# Altium PCB DiAoPu.PcbDoc
Units mm, origin at the board's own origin, x right, y up, seen from the top; angles counter-clockwise.
Board outline 36.45 x 14.22 mm, 4 copper layers (Component Side, Ground Plane, Power Plane, Solder Side), stack 0.844 mm thick; 21 components, 16 nets, 65 pads, 70 vias.
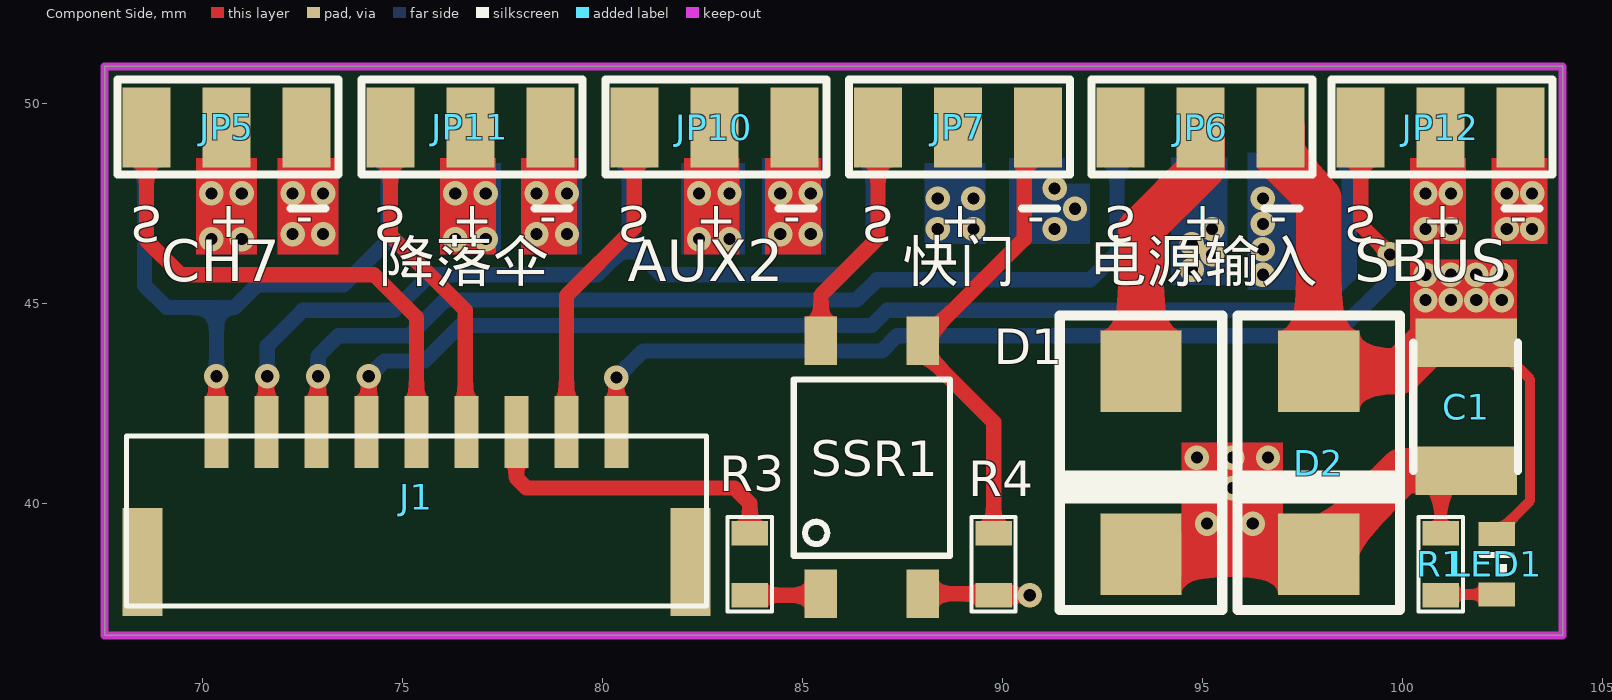
[diagram p0: Component Side view]
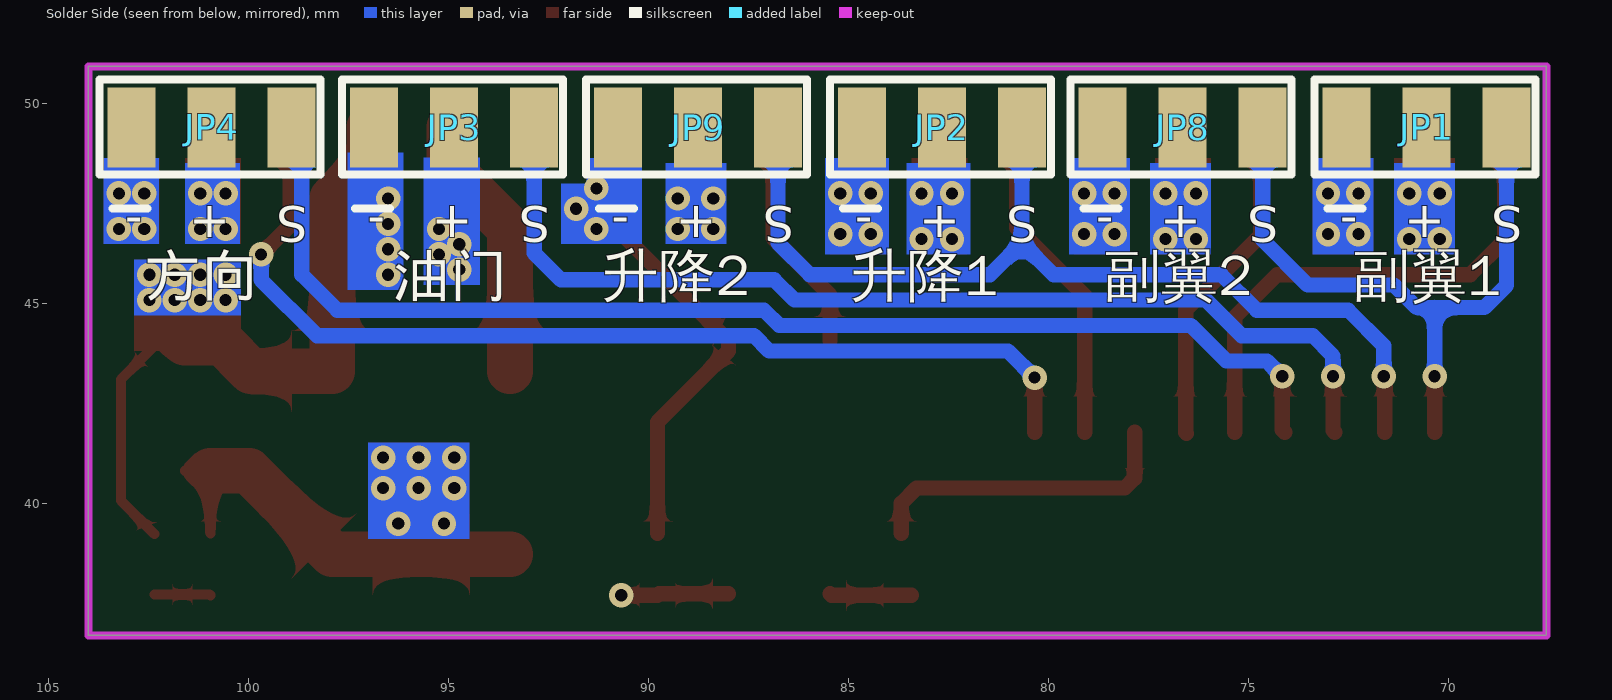
[diagram p1: Solder Side view, seen from below]
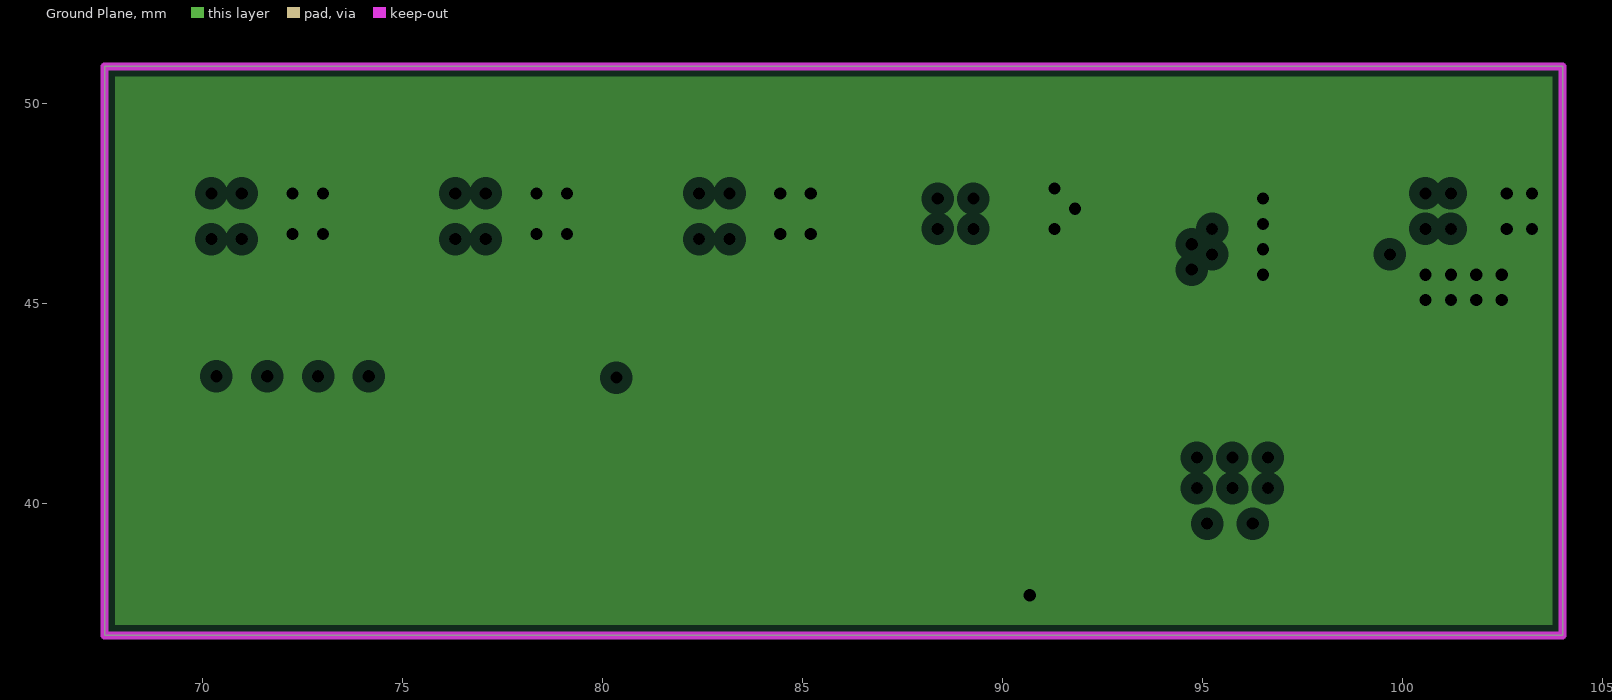
[diagram p2: Ground Plane, clearances drawn from the general rule]
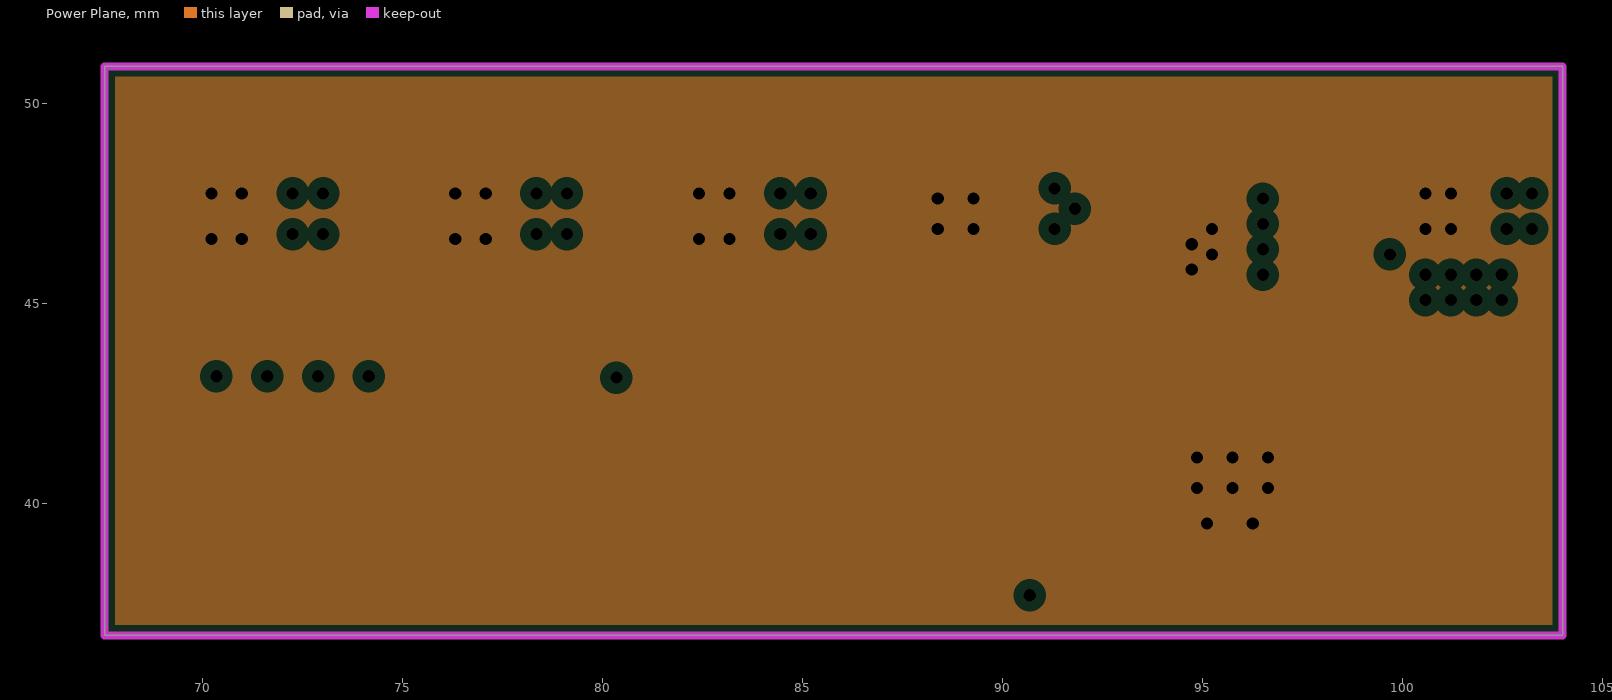
[diagram p3: Power Plane, clearances drawn from the general rule]
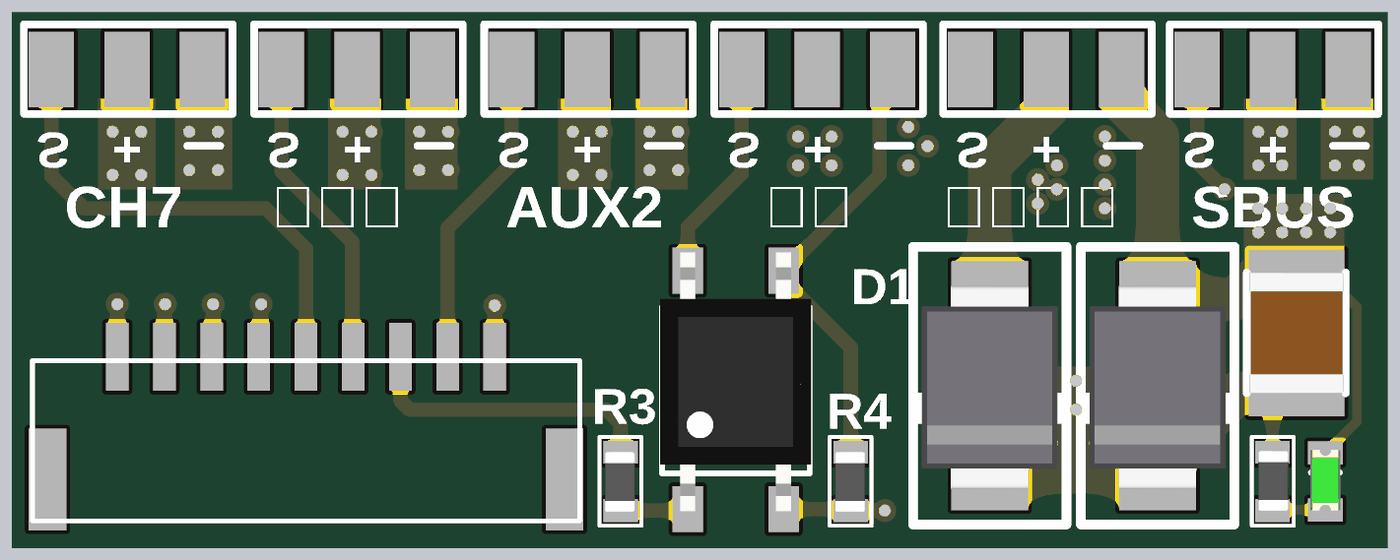
[diagram p4: 3D render of the assembled board from above, using the file's embedded part models]

## Layer stack, top to bottom
Top Solder: solder mask 0.0102, Solder Resist, Dk 3.5
Component Side: signal copper 0.0356
Dielectric 1: core 0.32, FR-4, Dk 4.8
Ground Plane: plane copper 0.036, net GND
Dielectric 3: prepreg 0.127, Dk 4.2
Power Plane: plane copper 0.036, net VCC_5V
Dielectric 4: core 0.254, Dk 4.2
Solder Side: signal copper 0.0356
Bottom Solder: solder mask 0.0102, Solder Resist, Dk 3.5

## Board outline
67.564,36.703 67.564,50.927 104.013,50.927 104.013,36.703

## Design rules (kind name [scope] priority, off if disabled: settings)
Clearance [All] p1: gap=0.203 ignorepadtopadclearanceinfootprint=FALSE
PlaneClearance [All] p1: clearance=0.254
PlaneConnect [All] p1: planeconnectstyle=Direct reliefexpansion=0.508 reliefentries=4 reliefconductorwidth=0.254 reliefairgap=0.254
PolygonConnect [All] p1: connectstyle=Relief reliefconductorwidth=0.254 reliefentries=4 polygonreliefangle="90 Angle" airgapwidth=0.254
RoutingVias [All] p1: holewidth=0.711 width=1.27 viastyle="Through Hole" minholewidth=0.305 minwidth=0.61 maxholewidth=0.711 maxwidth=1.27
SolderMaskExpansion [All] p1: expansion=0.102
Width [All] p1: maxlimit=2.54 minlimit=0.203 preferedwidth=0.254
28 further rules are at their usual default settings.

## Components (designator, comment, footprint, x,y, rotation, side; value= is the part's Value field where it differs from the comment)
C1 "100uF" 1210-CAP 101.6,42.418 r90 top
D1 "Schottky barrier diode in DO214AC, e.g. Fairchild SS14." DO-214AA 93.472,43.307 r270 top value=SS24
D2 "DIODE-Bi−Directional TVS" DO-214AA 97.917,43.307 r270 top value=P6SMB36CAT3G
J1 "SM09B-GHS-TB(LF)(SN)" SM09B-GHS-TB(LF) 75.358,39.908 r0 top
JP1 "AIL Left" "SJ_3 2MM Pitch" 70.56,49.403 r0 bottom
JP2 "ELE Left" "SJ_3 2MM Pitch" 82.677,49.403 r0 bottom
JP3 "THR" "SJ_3 2MM Pitch" 94.869,49.403 r0 bottom
JP4 "RUD" "SJ_3 2MM Pitch" 100.933,49.403 r0 bottom
JP5 "Parachute" "SJ_3 2MM Pitch" 70.612,49.403 r0 top
JP6 "5V Input" "SJ_3 2MM Pitch" 94.964,49.403 r0 top
JP7 "Camera Shutter" "SJ_3 2MM Pitch" 88.9,49.403 r0 top
JP8 "AIL Right" "SJ_3 2MM Pitch" 76.656,49.403 r0 bottom
JP9 "ELE Right" "SJ_3 2MM Pitch" 88.773,49.403 r0 bottom
JP10 "AUX2" "SJ_3 2MM Pitch" 82.804,49.403 r0 top
JP11 "CH8" "SJ_3 2MM Pitch" 76.708,49.403 r0 top
JP12 "SBUS" "SJ_3 2MM Pitch" 100.965,49.403 r0 top
LED1 "<b>LEDs</b> / Standard schematic elements and footprints for 5mm, 3mm, 1206, and 0603 sized LEDs. 5mm - Spark Fun Electronics SKU : COM-00529 (and others)" 0603-LED 102.362,38.481 r270 top value=BLUE
R1 "<b>Resistor</b> / Basic schematic elements and footprints for 0603, 1206, and PTH 1/10th watt (small) resistors." 0603-RES 100.965,38.481 r270 top value="1K 10%"
R3 "0R" 0603-RES 83.693,38.481 r90 top value="10K 5%"
R4 "0R" 0603-RES 89.789,38.481 r90 top value="10K 5%"
SSR1 "TLP3123(F)" SOP4-2.54 86.741,40.894 r0 top

## Footprints (in the part's own frame and the unit in brackets; to place one, negate y for a bottom-side part, rotate by r counter-clockwise, add the part's x,y. Pads: shape width x height; smd on the part's side, far side on the other; paste and mask are expansions set on the pad)
0603-LED [mil]
  rect 24x36 smd: A(29.76,0) C(-29.76,0)
  silkscreen extent -9,-15 10,15, body extent -33,-16 31,16, height 23
0603-RES [mil]
  rect 24x36 smd: 1(-30.5,0) 2(30.5,0)
  silkscreen extent -46,-22 46,22, body extent -32,-15 31,16, height 15
1210-CAP [mil]
  rect 48x100 smd: 1(-62.99,0) 2(63,0)
  silkscreen extent -63,-51 63,52, body extent -63,-49 63,49, height 51
DO-214AA [mil]
  rect 80x80 smd: A(0,0) C(180,0)
  silkscreen extent -55,-80 235,80, body extent -14,-71 198,71, height 91
"SJ_3 2MM Pitch" [mm]
  rect 1.2x2 smd: 1(-2,0) 2(0,0) 3(2,0)
  silkscreen extent -2.72,-1.2 2.8,2.02
SM09B-GHS-TB(LF) [mm]
  rect 0.6x1.8 smd: 1(-5,1.875) 2(-3.75,1.875) 3(-2.5,1.875) 4(-1.25,1.875) 5(0,1.875) 6(1.25,1.875) 7(2.5,1.875) 8(3.75,1.875) 9(5,1.875)
  rect 1x2.7 smd: ""(-6.85,-1.375) ""(6.85,-1.375)
  silkscreen extent -7.25,-2.47 7.25,1.78
SOP4-2.54 [mil]
  rect 32x48 smd: 1(-50,-124.02) 2(50,-124.02) 3(50,125) 4(-50,125)
  silkscreen extent -77,-87 77,87, body extent -79,-126 79,144, height 80

## Part data
C1: library part CAP0402-CAP, "<b>Capacitor</b> / Standard 0603 ceramic capacitor, and 0.1\" leaded capacitor.", >VALUE=4.7μF/50V/X7R, PARTNO=GRM32ER71H475K, >NAME=C10
D1: library part DIODE-SCHOTTKY_SMA
D2: library part "DIODE-Bi?Directional TVS"
JP1 JP2 JP3 JP4 JP5 JP6 JP7 JP8 JP9 JP10 JP11 JP12: library part JUMPER-3SMD
LED1: library part LED0603
R1 R3 R4: library part RESISTOR0603-RES
SSR1: library part TLP3123SO

## Via types
v1: diameter 0.61, hole 0.305, Component Side to Solder Side, tented both sides, 70 vias

## Nets (pads, with @x,y where several pads share a name; then routed paths per layer and width w, separated by ;. In a path a pad name is that pad's centre, name@x,y a point inside that pad or via, vN(x,y) a via of type N, cw(c..) or ccw(c..) an arc to the next point about the centre after c; other vN are vias at no path point)
AUX1: J1.7 R3.2 | length 8
  Component Side w0.381: J1.7 77.858,40.633 78.105,40.386 83.312,40.386 83.693,40.005 R3.2
AUX2: J1.8 JP10.1 | length 8.3
  Component Side w0.381: J1.8 79.108,45.199 80.804,46.895 JP10.1
CH1: J1.1 JP1.1 JP8.1 | length 16.9
  Component Side w0.381: J1.1 v1(70.358,43.18)
  Solder Side w0.381: JP1.1 68.56,45.455 69.116,44.899 70.358,44.899 ; v1(70.358,43.18) 70.358,44.899 ; JP8.1 74.656,46.589 73.533,45.466 71.374,45.466 70.807,44.899 70.358,44.899
CH2: J1.2 JP2.1 JP9.1 | length 24.8
  Component Side w0.381: J1.2 71.608,43.16 v1(71.628,43.18)
  Solder Side w0.381: v1(71.628,43.18) 71.628,43.942 72.517,44.831 74.803,44.831 75.692,45.72 79.883,45.72 80.677,46.514 ; JP2.1 80.677,46.514 ; JP9.1 86.773,46.514 85.979,45.72 81.471,45.72 80.677,46.514
CH3: J1.3 JP3.1 | length 26.1
  Component Side w0.381: J1.3 72.898,41.823 v1(72.898,43.18)
  Solder Side w0.381: v1(72.898,43.18) 72.898,43.688 73.406,44.196 75.184,44.196 76.073,45.085 86.36,45.085 86.868,45.593 92.202,45.593 92.869,46.26 JP3.1
CH4: J1.4 JP4.1 | length 30.8
  Component Side w0.381: J1.4 74.168,41.843 v1(74.168,43.18)
  Solder Side w0.381: v1(74.168,43.18) 74.549,43.561 75.565,43.561 76.454,44.45 86.741,44.45 87.122,44.831 97.79,44.831 98.679,45.72 98.679,49.149 JP4.1
CH7: J1.5 JP5.1 | length 13.2
  Component Side w0.381: JP5.1 68.612,46.577 69.469,45.72 74.295,45.72 75.358,44.657 J1.5
CH8: J1.6 JP11.1 | length 8.4
  Component Side w0.381: JP11.1 74.708,46.704 76.581,44.831 76.581,41.773 J1.6@76.561,41.753
GND: C1.2 D2.A JP1.3 JP2.3 JP3.3 JP4.3 JP5.3 JP6.3 JP8.3 JP9.3 JP10.3 JP11.3 JP12.3 LED1.C R4.1 SSR1.2 | length 19.3
  Component Side w0.254: C1.2 102.286,44.018 103.2,43.104 103.2,40.072 102.366,39.237 LED1.C
  Component Side w0.381: SSR1.2 89.751,37.744 R4.1 v1(90.691,37.706)
  Component Side w1.143: JP6.3@96.996,49.403 96.996,48.546 97.917,47.625 D2.A 99.949,43.307 100.66,44.018 C1.2
  other v1: 100.584,45.085 101.219,45.085 101.854,45.085 102.489,45.085 96.52,45.72 100.584,45.72 101.219,45.72 101.854,45.72 102.489,45.72 96.52,46.355 72.263,46.736 73.025,46.736 78.359,46.736 79.121,46.736 84.455,46.736 85.217,46.736 91.313,46.863 102.616,46.863 103.251,46.863 96.52,46.99 91.821,47.371 96.52,47.625 72.263,47.752 73.025,47.752 78.359,47.752 79.121,47.752 84.455,47.752 85.217,47.752 102.616,47.752 103.251,47.752 91.313,47.879
NetD1_A: D1.A JP6.2 | length 6.7
  Component Side w1.143: D1.A 93.472,46.863 94.996,48.387 JP6.2@94.996,49.403
NetJP7_3: JP7.3 R4.2 SSR1.3 | length 12.1
  Component Side w0.381: R4.2 89.789,42.037 88.011,43.815 SSR1.3 90.551,46.609 90.551,49.054 JP7.3
NetLED1_A: LED1.A R1.2 | length 1.4
  Component Side w0.254: R1.2 100.984,37.725 LED1.A
NetR3_1: R3.1 SSR1.1 | length 2
  Component Side w0.381: R3.1@83.439,37.706 R3.1 85.433,37.706 SSR1.1
SBUS: J1.9 JP12.1 | length 25.8
  Component Side w0.381: J1.9 v1(80.358,43.147) ; JP12.1 98.965,46.958 v1(99.695,46.228)
  Solder Side w0.381: v1(80.358,43.147) 81.026,43.815 86.995,43.815 87.376,44.196 98.298,44.196 99.695,45.593 v1(99.695,46.228)
Shutter: JP7.1 SSR1.4 | length 5.9
  Component Side w0.381: SSR1.4 85.471,45.212 86.9,46.641 JP7.1
VCC_5V: C1.1 D1.C D2.C JP1.2 JP2.2 JP3.2 JP4.2 JP5.2 JP8.2 JP9.2 JP10.2 JP11.2 JP12.2 R1.1 | length 10.6
  Component Side w0.254: R1.1 100.965,40.818 C1.1
  Component Side w1.143: D1.C D2.C 100,40.818 C1.1@100.965,40.818
  other v1: 95.123,39.497 96.266,39.497 94.869,40.386 95.758,40.386 96.647,40.386 94.869,41.148 95.758,41.148 96.647,41.148 94.742,45.847 95.25,46.228 94.742,46.482 70.231,46.609 70.993,46.609 76.327,46.609 77.089,46.609 82.423,46.609 83.185,46.609 88.392,46.863 89.281,46.863 95.25,46.863 100.584,46.863 101.219,46.863 88.392,47.625 89.281,47.625 70.231,47.752 70.993,47.752 76.327,47.752 77.089,47.752 82.423,47.752 83.185,47.752 100.584,47.752 101.219,47.752
pads on no net: J1. JP6.1 JP7.2

## Polygon pours and split planes (outlines as drawn)
GND on Ground Plane (split plane): 103.757,36.959 67.82,36.959 67.82,50.671 103.757,50.671
VCC_5V on Power Plane (split plane): 103.757,36.959 67.82,36.959 67.82,50.671 103.757,50.671

## Keep-outs
Keep-Out Layer:
  the board outline again, w0.2

## Other copper
Component Side:
  rectangle net GND: 102.235,46.482 103.632,48.641
  rectangle net VCC_5V: 100.203,46.482 101.6,48.641
  rectangle net VCC_5V: 82.042,46.228 83.439,48.641
  rectangle net GND: 84.074,46.228 85.471,48.641
  rectangle net VCC_5V: 75.946,46.228 77.343,48.641
  rectangle net GND: 77.978,46.228 79.375,48.641
  rectangle net GND: 71.882,46.228 73.406,48.641
  rectangle net VCC_5V: 69.85,46.228 71.374,48.641
  rectangle net VCC_5V: 94.488,38.735 97.028,41.529
  rectangle net GND: 100.203,43.815 102.87,46.101
Solder Side:
  rectangle net VCC_5V: 94.488,39.116 97.028,41.529
  rectangle net GND: 100.203,44.704 102.87,46.101
  rectangle net GND: 91.44,46.482 92.202,48.006
  rectangle net VCC_5V: 100.223,46.482 101.6,48.514
  rectangle net GND: 102.255,46.482 103.632,48.641
  rectangle net VCC_5V: 88.063,46.482 89.587,48.514
  rectangle net GND: 90.17,46.482 91.567,48.641
  rectangle net VCC_5V: 81.967,46.228 83.566,48.514
  rectangle net GND: 83.999,46.228 85.598,48.641
  rectangle net VCC_5V: 75.946,46.228 77.47,48.514
  rectangle net GND: 77.978,46.228 79.502,48.641
  rectangle net GND: 71.882,46.228 73.406,48.641
  rectangle net VCC_5V: 69.85,46.228 71.374,48.514
  region net GND: 97.536,48.768 97.536,45.339 96.139,45.339 96.139,48.768
  region net VCC_5V: 94.234,48.641 94.234,45.466 95.631,45.466 95.631,48.641

## Silkscreen, mask and mechanical layers (free items; w line width, h text height)
Top Overlay:
  text "CH7" at 68.961,45.212 h1.78
  text "降落伞" at 74.422,45.212 h1.78
  text "AUX2" at 80.645,45.212 h1.78
  text "快门" at 87.503,45.212 h1.78
  text "电源输入" at 92.202,45.212 h1.78
  text "SBUS" at 98.806,45.212 h1.78
Bottom Overlay:
  text "副翼1" at 72.39,44.861 h1.78
  text "副翼2" at 78.613,44.861 h1.78
  text "升降1" at 84.963,44.861 h1.78
  text "升降2" at 91.186,44.861 h1.78
  text "方向" at 102.616,44.85 h1.78
  text "油门" at 96.393,44.831 h1.78

## Text inside footprints (layer, text, board x,y; h text height)
JP1: Mechanical 4 ">VALUE" at 69.349,49.403 h0.04 r180; Bottom Overlay "S   +   -" at 68.16,47.728 h1.52 r180
JP2: Mechanical 4 ">VALUE" at 81.466,49.403 h0.04 r180; Bottom Overlay "S   +   -" at 80.277,47.728 h1.52 r180
JP3: Mechanical 4 ">VALUE" at 93.658,49.403 h0.04 r180; Bottom Overlay "S   +   -" at 92.469,47.728 h1.52 r180
JP4: Mechanical 4 ">VALUE" at 99.722,49.403 h0.04 r180; Bottom Overlay "S   +   -" at 98.533,47.728 h1.52 r180
JP5: Top Overlay "S   +   -" at 68.212,47.728 h1.52 r180; Mechanical 4 ">VALUE" at 69.401,49.403 h0.04 r180
JP6: Top Overlay "S   +   -" at 92.564,47.728 h1.52 r180; Mechanical 4 ">VALUE" at 93.753,49.403 h0.04 r180
JP7: Top Overlay "S   +   -" at 86.5,47.728 h1.52 r180; Mechanical 4 ">VALUE" at 87.689,49.403 h0.04 r180
JP8: Mechanical 4 ">VALUE" at 75.445,49.403 h0.04 r180; Bottom Overlay "S   +   -" at 74.256,47.728 h1.52 r180
JP9: Mechanical 4 ">VALUE" at 87.562,49.403 h0.04 r180; Bottom Overlay "S   +   -" at 86.373,47.728 h1.52 r180
JP10: Top Overlay "S   +   -" at 80.404,47.728 h1.52 r180; Mechanical 4 ">VALUE" at 81.593,49.403 h0.04 r180
JP11: Top Overlay "S   +   -" at 74.308,47.728 h1.52 r180; Mechanical 4 ">VALUE" at 75.497,49.403 h0.04 r180
JP12: Top Overlay "S   +   -" at 98.565,47.728 h1.52 r180; Mechanical 4 ">VALUE" at 99.754,49.403 h0.04 r180